# Altium PCB Encoder_v2.1.PcbDoc
Units mm, origin at the board's own origin, x right, y up, seen from the top; angles counter-clockwise.
Board outline 13.8 x 28.4 mm, 2 copper layers (Top Layer, Bottom Layer), stack 1.571 mm thick; 13 components, 12 nets, 49 pads, 13 vias.
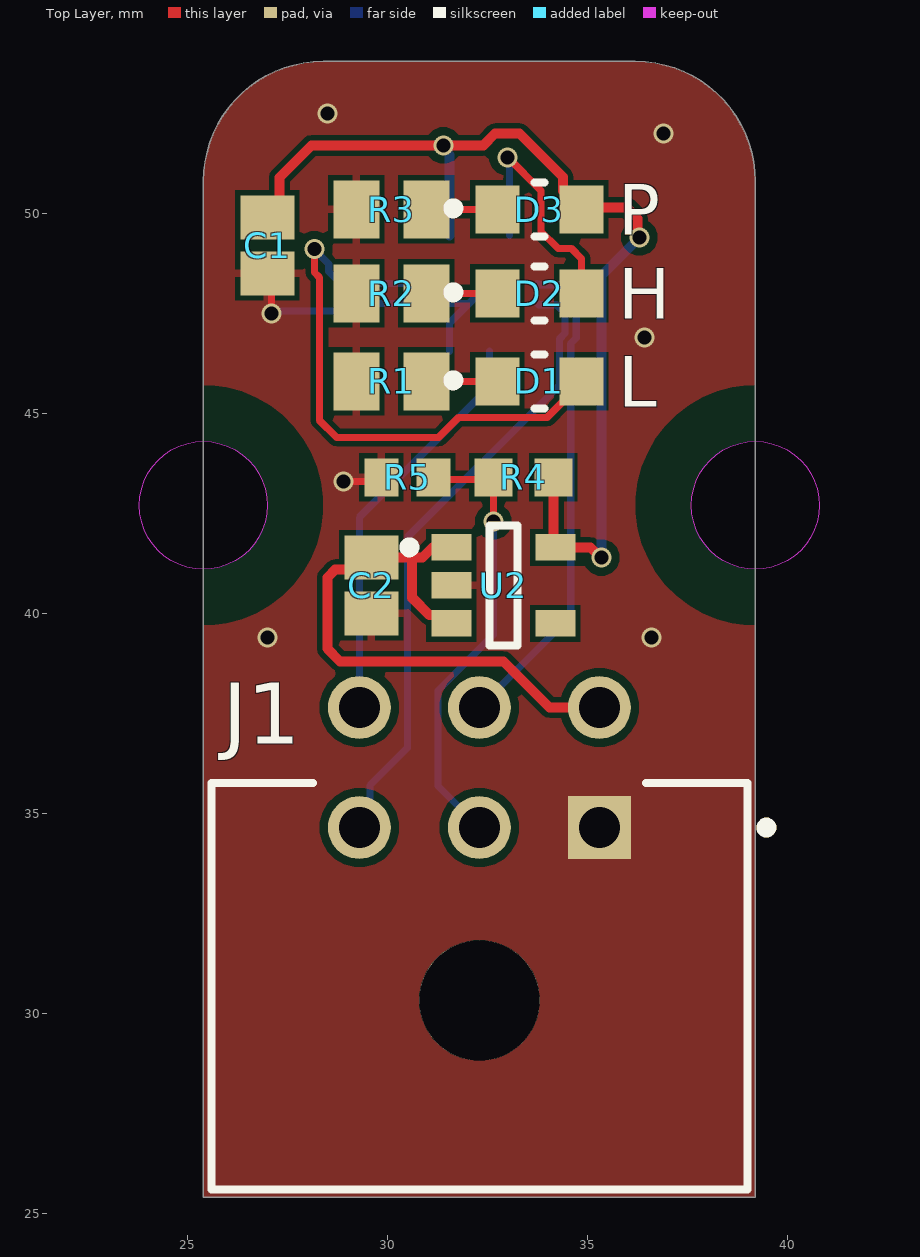
[diagram p0: Top Layer view]
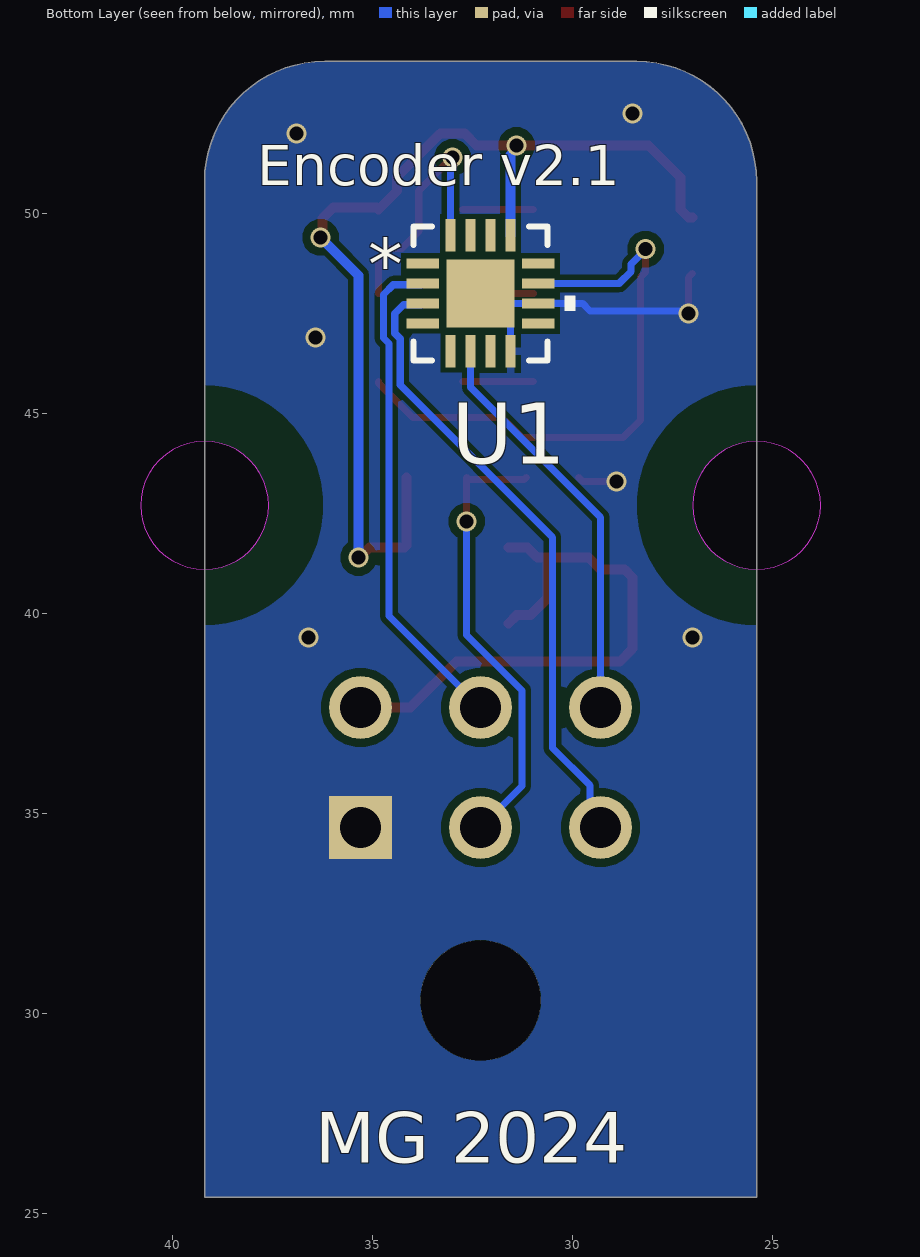
[diagram p1: Bottom Layer view, seen from below]
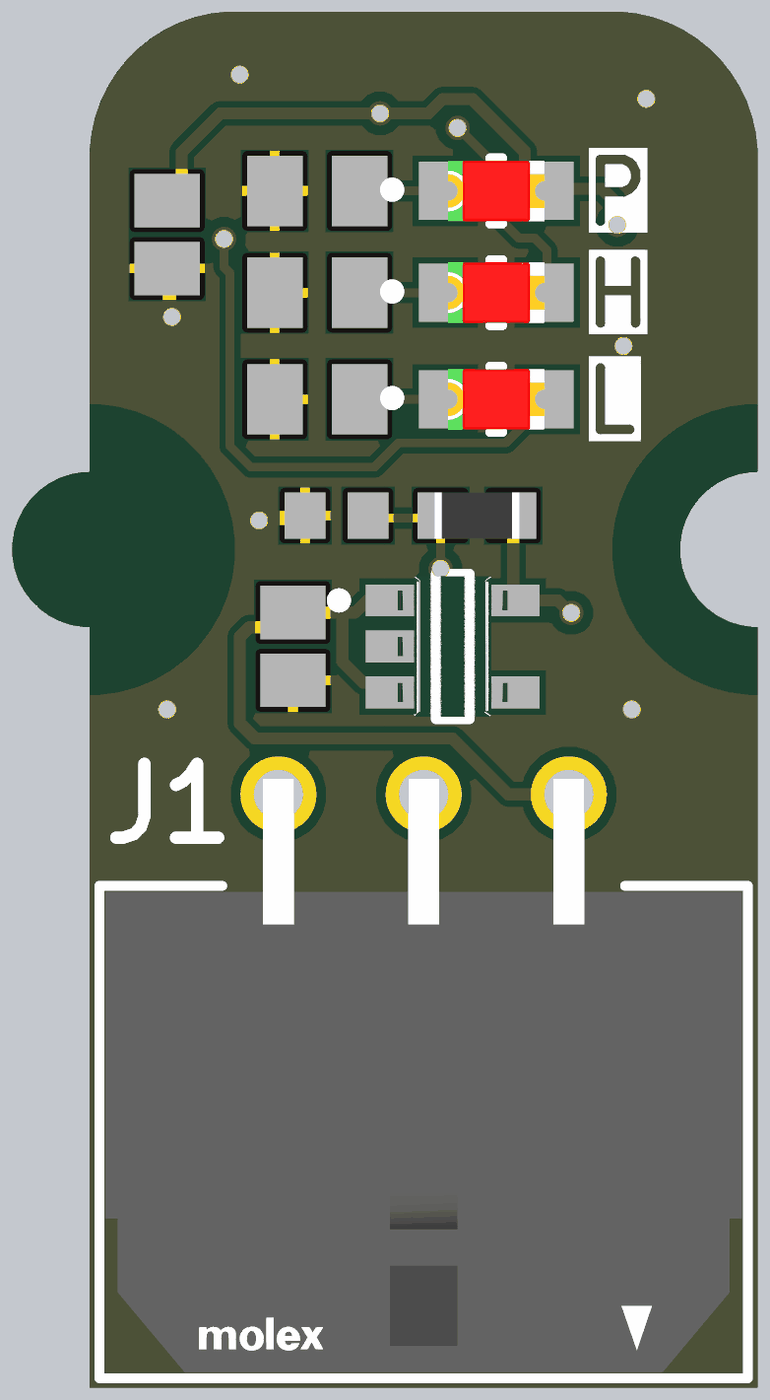
[diagram p2: 3D render of the assembled board from above, using the file's embedded part models]

## Layer stack, top to bottom
Top Solder: solder mask 0.0102, Solder Resist, Dk 3.5
Top Layer: signal copper 0.0356
Dielectric 1: dielectric 1.5, FR-4, Dk 4.8
Bottom Layer: signal copper 0.0356
Bottom Solder: solder mask 0.0102, Solder Resist, Dk 3.5

## Board outline
25.4,25.4 25.4,50.8 cw(c28.4,50.8) 28.4,53.8 36.2,53.8 cw(c36.2,50.8) 39.2,50.8 39.2,25.4
cut-out: 39.2,41.1 cw(c39.2,42.7) 37.6,42.7 cw(c39.2,42.7) 39.2,44.3 cw(c39.2,42.7) 40.8,42.7 cw(c39.2,42.7)
cut-out: 25.4,41.1 cw(c25.4,42.7) 23.8,42.7 cw(c25.4,42.7) 25.4,44.3 cw(c25.4,42.7) 27,42.7 cw(c25.4,42.7)

## Design rules (kind name [scope] priority, off if disabled: settings)
Clearance Clearance_POWER [(InNet('NetC205_2') OR InNet('NETC203_2') OR InNet('NETC206_2') OR InNet('NetP410_1') OR InNet('NetP410_3') OR InNet('VM'))] p1: gap=0.254 ignorepadtopadclearanceinfootprint=FALSE except(0: SMDPad-Hole THPad-Hole Via-Hole Fill-Hole Poly-Hole Region-Hole Text-Hole; 0.1: Arc-Arc Arc-Track Track-Track; 0.127: Arc-THPad Arc-Fill Arc-Poly Arc-Region Track-THPad Track-Fill Track-Poly Track-Region SMDPad-SMDPad; 0.2: Arc-SMDPad Track-SMDPad; 0.5: THPad-THPad THPad-Fill THPad-Poly THPad-Region Fill-Fill Fill-Poly Fill-Region Poly-Poly Poly-Region Region-Region)
Clearance [All] p2: gap=0.127 ignorepadtopadclearanceinfootprint=FALSE except(0: SMDPad-Hole THPad-Hole Via-Hole Fill-Hole Poly-Hole Region-Hole Text-Hole; 0.1: Arc-Arc Arc-Track Track-Track; 0.2: Arc-SMDPad Track-SMDPad THPad-Fill THPad-Poly THPad-Region Via-Fill Via-Poly Via-Region; 0.254: Arc-Via Arc-Text Arc-Hole Track-Via Track-Text Track-Hole SMDPad-THPad SMDPad-Via SMDPad-Text THPad-Via THPad-Text Via-Via Via-Text Fill-Text Poly-Text Region-Text Text-Text; 0.5: THPad-THPad)
ComponentClearance [All] p1: gap=0.127 collisioncheckmode=3 verticalgap=0.254 showdistances=FALSE
HoleSize [All] p1: absolutevalues=TRUE maxlimit=6.5 minlimit=0.025 maxpercent=80.000 minpercent=20.000
MinimumSolderMaskSliver [All] p1: minsoldermaskwidth=0.08
PlaneClearance [All] p1: clearance=0.2
PlaneConnect [All] p1: planeconnectstyle=Direct reliefexpansion=0.508 reliefentries=4 reliefconductorwidth=0.254 reliefairgap=0.254
PolygonConnect PolygonConnect_GND_POWER [InNet('GND') vs (HasFootprint('FP-FC-G-MFG') OR HasFootprint('FP-CL32-IPC_B') OR HasFootprint('TSON Advance_TOS') OR HasFootprint('XT60+MR60') OR HasFootprint('XT-60') OR HasFootprint('FP-SMAJ-CA-MFG') OR InNamedPolygon('GND_L01_P000'))] p1: connectstyle=Direct reliefconductorwidth=0.254 reliefentries=4 polygonreliefangle="90 Angle" airgapwidth=0.254
PolygonConnect PolygonConnect_GND [InNet('GND')] p2: thpad.connectstyle=Direct thpad.reliefconductorwidth=0.254 thpad.reliefentries=4 thpad.polygonreliefangle="90 Angle" thpad.airgapwidth=0.254 smdpad.connectstyle=Relief smdpad.reliefconductorwidth=0.2 smdpad.reliefentries=4 smdpad.polygonreliefangle="90 Angle" smdpad.airgapwidth=0.127 via.connectstyle=Direct via.reliefconductorwidth=0.254 via.reliefentries=4 via.polygonreliefangle="90 Angle" via.airgapwidth=0.254
PolygonConnect [All] p3: connectstyle=Direct reliefconductorwidth=0.254 reliefentries=4 polygonreliefangle="90 Angle" airgapwidth=0.254
RoutingVias [All] p1: holewidth=0.3 width=0.45 viastyle="Through Hole" minholewidth=0.3 minwidth=0.45 maxholewidth=0.55 maxwidth=0.7
SilkToSilkClearance [All] p1: silktosilkclearance=0
SilkToSolderMaskClearance [IsPad] p1: minsilkscreentomaskgap=0.15 clearancetoexposedcopper=TRUE
SolderMaskExpansion [All] p1: expansion=0.1 istentingtop=FALSE
SupplyNets "Schematic Supply Nets_2" [InNet('+5')] p1: voltage=0.000
SupplyNets "Schematic Supply Nets_1" [InNet('+3.3')] p2: voltage=0.000
SupplyNets "Schematic Supply Nets" [InNet('GND')] p3: voltage=0.000
Width Width_voltage [InNetClass('Voltage')] p1: maxlimit=0.5 minlimit=0.18 preferedwidth=0.18 minimp=50.000000 maximp=50.000000 favimp=50.000000
Width [All] p2: maxlimit=0.5 minlimit=0.127 preferedwidth=0.18 minimp=50.000000 maximp=50.000000 favimp=50.000000
23 further rules are at their usual default settings.

## Components (designator, comment, footprint, x,y, rotation, side; value= is the part's Value field where it differs from the comment)
C1 "1uF" CAPC2013X145X50LL20T25 27,49.2 r90 top
C2 "1uF" CAPC2013X145X50LL20T25 29.6,40.7 r90 top
D1 "150080SS75000" FP-150080SS75000-MFG 33.8,45.8 r0 top
D2 "150080SS75000" FP-150080SS75000-MFG 33.8,48 r0 top
D3 "150080SS75000" FP-150080SS75000-MFG 33.8,50.1 r0 top
J1 "43045-0600" FP-0430450600-MFG 32.3,30.68 r0 top locked
R1 "220R" RESC2013X70X40NL20T20 30.1,45.8 r0 top
R2 "220R" RESC2013X70X40NL20T20 30.1,48 r0 top
R3 "220R" RESC2013X70X40NL20T20 30.1,50.1 r0 top
R4 "10k" RESC1609X55X30NL15T15 33.4,43.4 r0 top
R5 "10k NTC" RESC1608X90X30NL15T20 30.5,43.4 r180 top
U1 "MA732GQ-Z" QFN-16_MA732 32.3,48 r180 bottom
U2 "MIC5504-3.3YM5-TR" FP-SOT23-5LD-PL-1-MFG 32.9,40.7 r0 top

## Footprints (in the part's own frame and the unit in brackets; to place one, negate y for a bottom-side part, rotate by r counter-clockwise, add the part's x,y. Pads: shape width x height; smd on the part's side, far side on the other; paste and mask are expansions set on the pad)
CAPC2013X145X50LL20T25 [mm] "Chip Capacitor, 2-Leads, Body 2.00x1.25mm, IPC High Density"
  rect 1.1x1.35 smd: 1(-0.7,0) 2(0.7,0)
  body extent -1.1,-0.72 1.1,0.72, height 1.45
FP-150080SS75000-MFG [mm]
  rect 1.1x1.2 smd paste+0 mask+0: 1(-1.05,0) 2(1.05,0)
  silkscreen extent -2.27,-0.67 0.13,0.67, body extent -1.7,-0.77 1.7,0.77, height 0.25
FP-0430450600-MFG [mm]
  rect 1.57x1.57 hole 1.02 paste-2539.97 mask+0: 1(3,3.965)
  round 1.57 hole 1.02 paste-2539.97 mask+0: 2(0,3.965) 3(-3,3.965) 4(3,6.965) 5(0,6.965) 6(-3,6.965)
  round 3 hole 3 unplated paste-2539.97 mask+0: ""(0,-0.355)
  silkscreen extent -6.7,-5.08 7.3,5.08, body extent -6.8,-5.18 6.8,7.85, height 0.25
FP-SOT23-5LD-PL-1-MFG [mm]
  rect 1x0.66 smd paste+0 mask+0: 1(-1.3,0.95) 2(-1.3,0) 3(-1.3,-0.95) 4(1.3,-0.95) 5(1.3,0.95)
  silkscreen extent -2.47,-1.5 0.35,1.5, body extent -1.9,-1.6 1.9,1.6, height 0.25
QFN-16_MA732 [mil]
  rect 32x10 smd paste+0 mask+0: 1(-57,29.53) 2(-57,9.84) 3(-57,-9.84) 4(-57,-29.53) 9(57,-29.53) 10(57,-9.84) 11(57,9.84) 12(57,29.53)
  rect 10x32 smd paste+0 mask+0: 5(-29.53,-57) 6(-9.84,-57) 7(9.84,-57) 8(29.53,-57) 13(29.53,57) 14(9.84,57) 15(-9.84,57) 16(-29.53,57)
  rect 67x67 smd paste+0 mask+0: 17(0,0)
  silkscreen extent -66,-66 93,66, body extent -61,-61 61,61, height 37
RESC1608X90X30NL15T20 [mm] "Chip Resistor, 2-Leads, Body 1.60x0.80mm, IPC Medium Density"
  rect 0.85x0.95 smd: 1(-0.65,0) 2(0.65,0)
  body extent -0.88,-0.48 0.87,0.48, height 0.9
RESC1609X55X30NL15T15 [mm] "Chip Resistor, 2-Leads, Body 1.75x0.95mm, IPC Medium Density"
  rect 0.95x0.95 smd: 1(-0.75,0) 2(0.75,0)
  body extent -0.87,-0.48 0.87,0.48, height 0.55
RESC2013X70X40NL20T20 [mm] "Chip Resistor, 2-Leads, Body 2.2x1.35mm, IPC Medium Density"
  rect 1.15x1.45 smd: 1(-0.875,0) 2(0.875,0)
  body extent -1.1,-0.72 1.1,0.72, height 0.7

## Part data
C1 C2: library part CMP-1036-04746-2, Manufacturer=Kemet, Part Number=C0805C105K4PACTU
D1 D2 D3: library part CMP-1426-00010-2, "LED RED CLEAR 0805 SMD", Case Code (Imperial)=0805, Case Code (Metric)=2012, Color=Red, Forward Current=30mA, Forward Voltage=1.9V, Lens Color=Colorless, Max Operating Temperature=85°C, Min Operating Temperature=-40°C, Package Quantity=1, Test Current=20mA, Case/Package=0805, Dominant Wavelength=630nm, Height=0.8mm, Length=2mm, Lens Size=1.25mm, Lens Style=Clear, Lens Transparency=Clear, Luminous Intensity=60mcd, Mount="Surface Mount", Packaging="Cut Tape", RoHS Compliant=Yes, Series=WL-SMCW, Viewing Angle=140°, Wavelength=630nm, Width=1.25mm
J1: library part CMP-00257-00287064-1, "43045-0600 Connector Wire to Board Header 6 Position 3mm Solder Right Angle Thru-Hole Tray", Case/Package=SMC, Color=Black, Contact Resistance=10mΩ, Current Rating=5A, Flammability Rating="UL94 V-0", Insulation Resistance=1GΩ, Manufacturer Lifecycle Status=ACTIVE, Max Operating Temperature=105°C, Max Voltage Rating (DC)=250.25kV, Min Operating Temperature=-40°C, Voltage Rating=250V, Approvals="CSA, TUV, UL", Contact Material="Brass, Tin", Contact Plating=Tin, Country of Origin=US, Depth=12.2mm, Diameter=3mm, Gender=Male, Glow Wire Compliant=Compliant, Halogen Free="Low Halogen", Height=7.37mm, Housing Color=Black, Housing Material=Thermoplastic, Lead Free="Lead Free", Lead Pitch=3mm, Length=12.6mm, Lifecycle Status=Production, Material=Polyester, Max Current Rating=5A, Mount="Through Hole", NexarPartId=287064, Number of Circuits=6, Number of Contacts=6, Number of Pins=6, Number of Positions=6, Number of Rows=2, Orientation="Right Angle, Vertical", Packaging=Bulk, Pitch=3mm, Plating=Tin, Radiation Hardening=No, REACH SVHC="No SVHC", RoHS=Compliant, Row Spacing=3mm, Schedule B=8536694040, Termination=Solder, Voltage Rating (AC)=250V, Voltage Rating (DC)=250V, Width=9.9mm
R1 R2 R3: library part CMP-2001-00550-5, "Chip Resistor, 4.7 KOhm, +/- 1%, 0.125 W, -55 to 155 degC, 0805 (2012 Metric), RoHS, Tape and Reel", Manufacturer=Panasonic, Max Operating Temperature="155 degC", Min Operating Temperature="-55 degC", Package Quantity=5000, Voltage Rating="150 V", ComponentLink1Description="Manufacturer URL", ComponentLink1URL=http://www.panasonic.com/, ComponentLink2Description=Datasheet, ComponentLink2URL=http://industrial.panasonic.com/cdbs/www-data/pdf/RDA0000/AOA0000C86.pdf, DatasheetVersion=04/2015, Height="0.6 mm", Length="2 mm", Mount="Surface Mount", Mounting Technology="Surface Mount", PackageDescription="2-Pin Surface Mount Device, Body 2 x 1.25 mm", PackageReference=0805, Packaging="Tape and Reel", Pins=2, REACH SVHC=Yes, RoHSCompliant=true
R4: library part CMP-1012-00623-3, "Chip Resistor, 10 KOhm, +/- 1%, 0.1 W, -55 to 155 degC, 0603 (1608 Metric), RoHS, Tape and Reel", Case Code (Imperial)=0603, Case Code (Metric)=1608, Manufacturer=Panasonic, Max Operating Temperature=155degC, Max Power Dissipation=100mW, Min Operating Temperature=-55degC, Package Description="2-Pin Surface Mount Device, Body 1.6 x 0.85 mm", Package Quantity=1, Package Reference=603, Resistance=10KOhm, Temperature Coefficient=100ppm\/degreesC, Tolerance=1%, Voltage Rating=75V, Case\/Package=0603, Composition=ThickFilm, Contact Plating=Tin, Datasheet URL=https://industrial.panasonic.com/cdbs/www-data/pdf/RDA0000/AOA0000C304.pdf, Datasheet Version=02/2017, Depth=0.8mm, Height=0.45mm, Lead Free=LeadFree, Length=1.6mm, Manufacturer URL=http://www.panasonic.com/, Military Standard=Not, Mount=SurfaceMount, Mounting Technology=SurfaceMount, Number of Pins=2, Number of Terminations=2, Packaging=TapeandReel, Power Rating=100mW, Radiation Hardening=No, REACH SVHC=NoSVHC, RoHSCompliant=true, Termination=SMD/SMT, Voltage Rating (DC)=75V, Width=0.031inch
R5: library part CMP-2000-00869-1, Manufacturer=Panasonic, Part Number=ERT-J1VR103J
U1: "No Description Available", Mfr_Name="Monolithic Power Systems", Copyright="Copyright (C) 2023 Ultra Librarian. All rights reserved.", Manufacturer_Part_Number=MA732GQ-Z, RefDes=RefDes, Type=DEV
U2: library part CMP-2000-07604-2, "IC REG LINEAR 3.3V 300MA SOT23-5", Case/Package=SOT-23-5, Dropout Voltage=380mV, Max Input Voltage=5.5V, Max Operating Temperature=125°C, Max Output Current=300mA, Min Input Voltage=2.5V, Min Operating Temperature=-40°C, Nominal Output Voltage=3.3V, Operating Supply Current=42uA, Power Supply Rejection Ratio (PSRR)=60dB, Quiescent Current=38uA, Accuracy=3%, Height=1.1mm, Length=2.9mm, Mount="Surface Mount", Number of Outputs=1, Number of Pins=5, Output Current=300mA, Output Type=Fixed, Output Voltage=3.3V, Packaging="Tape and Reel", REACH SVHC="No SVHC", Width=1.6mm

## Via types
v1: diameter 0.5, hole 0.35, Top Layer to Bottom Layer, tented both sides, 13 vias

## Nets (pads, with @x,y where several pads share a name; then routed paths per layer and width w, separated by ;. In a path a pad name is that pad's centre, name@x,y a point inside that pad or via, vN(x,y) a via of type N, cw(c..) or ccw(c..) an arc to the next point about the centre after c; other vN are vias at no path point)
+3.3: C1.2 D3.2 R4.2 U1.13 U2.5 | length 25.6
  Top Layer w0.25: C1.2 27.1,49.9 27.3,50.1 27.3,50.9 28.1,51.7 32.399,51.7 32.693,51.994 33.306,51.994 34.39,50.91 34.39,50.56 D3.2 34.895,50.145 35.985,50.145 36.252,49.878 36.252,49.448 v1(36.3,49.4) ; R4.2 34.15,41.7 U2.5 35.075,41.65 35.332,41.393 v1(35.35,41.393)
  Bottom Layer w0.25: U1.13 31.55,51.463 ; v1(35.35,41.393) 35.35,48.45 v1(36.3,49.4)
  other v1: 31.4,51.7
+5: C2.2 J1.4 U2.1 U2.3 | length 14.7
  Top Layer w0.25: 30.5,41.4 C2.2 29.296,41.096 28.696,41.096 28.5,40.9 28.5,39.115 28.815,38.8 32.9,38.8 34.055,37.645 J1.4 ; U2.3 31.395,39.955 31.055,39.955 30.621,40.389 30.621,41.4 30.88,41.4 31.13,41.65 U2.1
A: J1.5 U1.2 | length 12.4
  Bottom Layer w0.18: J1.5 34.587,39.932 34.587,46.75 34.724,46.887 34.724,47.97 34.482,48.213 33.785,48.213 U1.2
B: J1.6 U1.6 | length 10.3
  Bottom Layer w0.18: J1.6 29.3,42.4 32.55,45.65 U1.6
GND: C1.1 C2.1 J1.1 R1.1 R2.1 R3.1 R5.2 U1.8 U1.10 U1.17 U2.2 | length 8.8
  Top Layer w0.18: C1.1 27.1,48.4 v1(27.1,47.5) ; v1(28.9,43.3) 29.75,43.3 R5.2
  Bottom Layer w0.18: v1(27.1,47.5) 27.161,47.561 29.561,47.561 29.75,47.75 U1.10 U1.17@32.05,47.75 ; U1.8 31.55,47.25 U1.17@32.05,47.75 ; U1.17 U1.17@32.05,47.75
  other v1: 27,39.4 36.6,39.4 36.429,46.9 36.9,52 28.5,52.5
NetD1_1: D1.1 R1.2 | length 1.8
  Top Layer w0.18: R1.2 D1.1
NetD1_2: D1.2 U1.11 | length 14.8
  Top Layer w0.18: v1(28.176,49.109) 28.176,48.524 28.3,48.4 28.3,44.83 28.73,44.4 31.285,44.4 31.785,44.9 34,44.9 34.85,45.75 D1.2
  Bottom Layer w0.18: v1(28.176,49.109) 28.176,49.093 28.535,48.733 28.535,48.548 28.833,48.25 U1.11
NetD2_1: D2.1 R2.2 | length 1.8
  Top Layer w0.18: R2.2 D2.1
NetD2_2: D2.2 U1.16 | length 6.3
  Top Layer w0.18: v1(33,51.4) 33.01,51.4 33.843,50.568 33.843,49.547 34.265,49.125 34.595,49.125 34.85,48.87 D2.2
  Bottom Layer w0.18: v1(33,51.4) 33.05,51.35 U1.16
NetD3_1: D3.1 R3.2 | length 1.8
  Top Layer w0.18: R3.2 D3.1
Rt: J1.2 R4.1 R5.1 | length 11.3
  Top Layer w0.18: R5.1 31.2,43.35 32.6,43.35 R4.1 v1(32.65,42.3)
  Bottom Layer w0.18: J1.2 31.263,35.682 31.263,38.075 32.65,39.462 v1(32.65,42.3)
Z: J1.3 U1.3 | length 15.8
  Bottom Layer w0.18: J1.3 29.563,34.908 29.563,35.7 30.5,36.637 30.5,41.9 34.307,45.707 34.307,46.866 34.444,47.003 34.444,47.497 34.228,47.713 33.785,47.713 U1.3
pads on no net: J1. U1.1 U1.4 U1.5 U1.7 U1.9 U1.12 U1.14 U1.15 U2.4

## Polygon pours and split planes (outlines as drawn)
GND on Top Layer "NONET_L-01_P-001" (solid, pour order 1): 39.2,25.4 25.4,25.4 25.4,53.8 39.2,53.8
GND on Bottom Layer "NONET_L-01_P-001" (solid, pour order 0): 25.4,25.4 39.2,25.4 39.2,53.8 25.4,53.8

## Other copper
Top Layer:
  pour cut-out: 39.2,39.702 cw(c39.2,42.702) 36.2,42.702 cw(c39.2,42.702) 39.2,45.702 cw(c39.2,42.702) 42.2,42.702 cw(c39.2,42.702)
  pour cut-out: 25.4,39.7 cw(c25.4,42.7) 22.4,42.7 cw(c25.4,42.7) 25.4,45.7 cw(c25.4,42.7) 28.4,42.7 cw(c25.4,42.7)
  pour cut-out: 36.2,53.8 39.2,53.8 39.2,53.6 39.2,50.8 ccw(c36.2,50.8)
  pour cut-out: 25.4,50.8 25.4,53.8 25.6,53.8 28.4,53.8 ccw(c28.4,50.8)
Bottom Layer:
  pour cut-out: 36.2,53.8 39.2,53.8 39.2,53.6 39.2,50.8 ccw(c36.2,50.8)
  pour cut-out: 25.4,50.8 25.4,53.8 25.6,53.8 28.4,53.8 ccw(c28.4,50.8)
  pour cut-out: 39.23,39.7 cw(c39.23,42.7) 36.23,42.7 cw(c39.23,42.7) 39.23,45.7 cw(c39.23,42.7) 42.23,42.7 cw(c39.23,42.7)
  pour cut-out: 25.4,39.7 cw(c25.4,42.7) 22.4,42.7 cw(c25.4,42.7) 25.4,45.7 cw(c25.4,42.7) 28.4,42.7 cw(c25.4,42.7)

## Silkscreen, mask and mechanical layers (free items; w line width, h text height)
Top Overlay:
  text "P" at 35.777,49.465 h1.27
  text "H" at 35.777,47.365 h1.27
  text "L" at 35.777,45.165 h1.27
Bottom Overlay:
  text "Encoder v2.1" at 37.882,50.7 h1
  text "MG 2024" at 36.432,26.265 h1.27
Mechanical 1:
  circle w0.254: c39.2,42.7 r1.6
  lines w0.1: 25.4,41.1 ccw(c25.4,42.7) 25.4,44.3 ; 39.2,41.1 cw(c39.2,42.7) 39.2,44.3 ; 25.4,25.4 25.4,50.8 cw(c28.4,50.8) 28.4,53.8 36.2,53.8 cw(c36.2,50.8) 39.2,50.8 39.2,25.4 25.4,25.4

## Dimensions
39.2,42.7 to 43.902,47.402 on Mechanical 1
36.2,53.8 to 39.1,25.5 on Mechanical 1
25.4,50.8 to 39.2,50.8 on Mechanical 1
28.4,50.8 to 22.9,53.4 on Mechanical 1
25.4,25.4 to 25.4,42.7 on Mechanical 1

## Text inside footprints (layer, text, board x,y; h text height)
U1: Mechanical 13 "*" at 33.024,48.115 h1.27; Bottom Overlay "*" at 35.107,48.115 h1.27